# EAGLE board schematic (EAGLE 8.2.1)
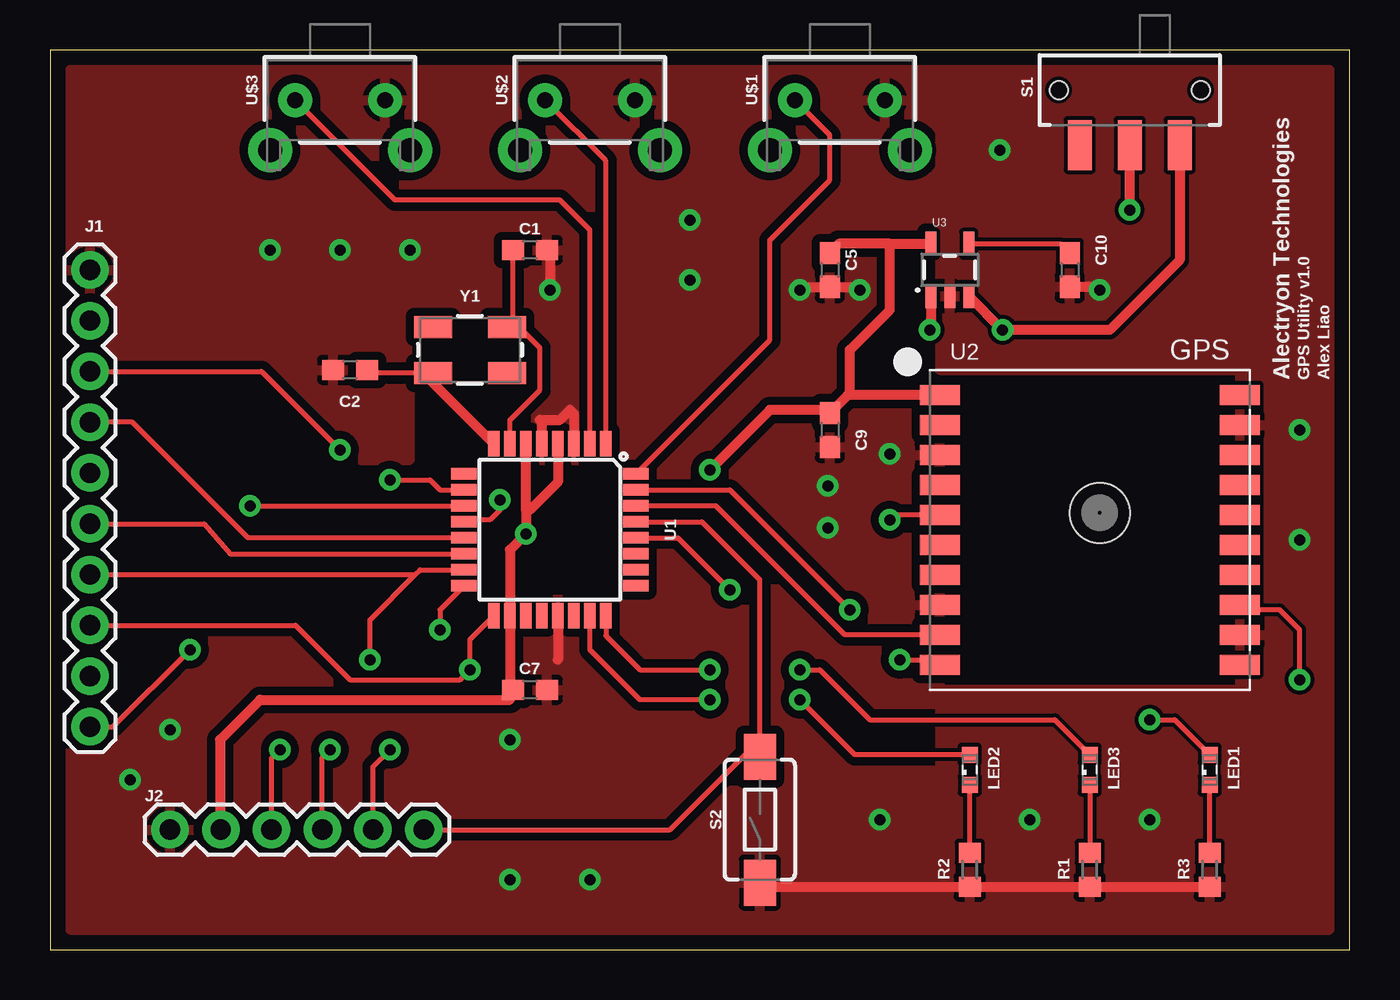
[diagram p0: board, top side]
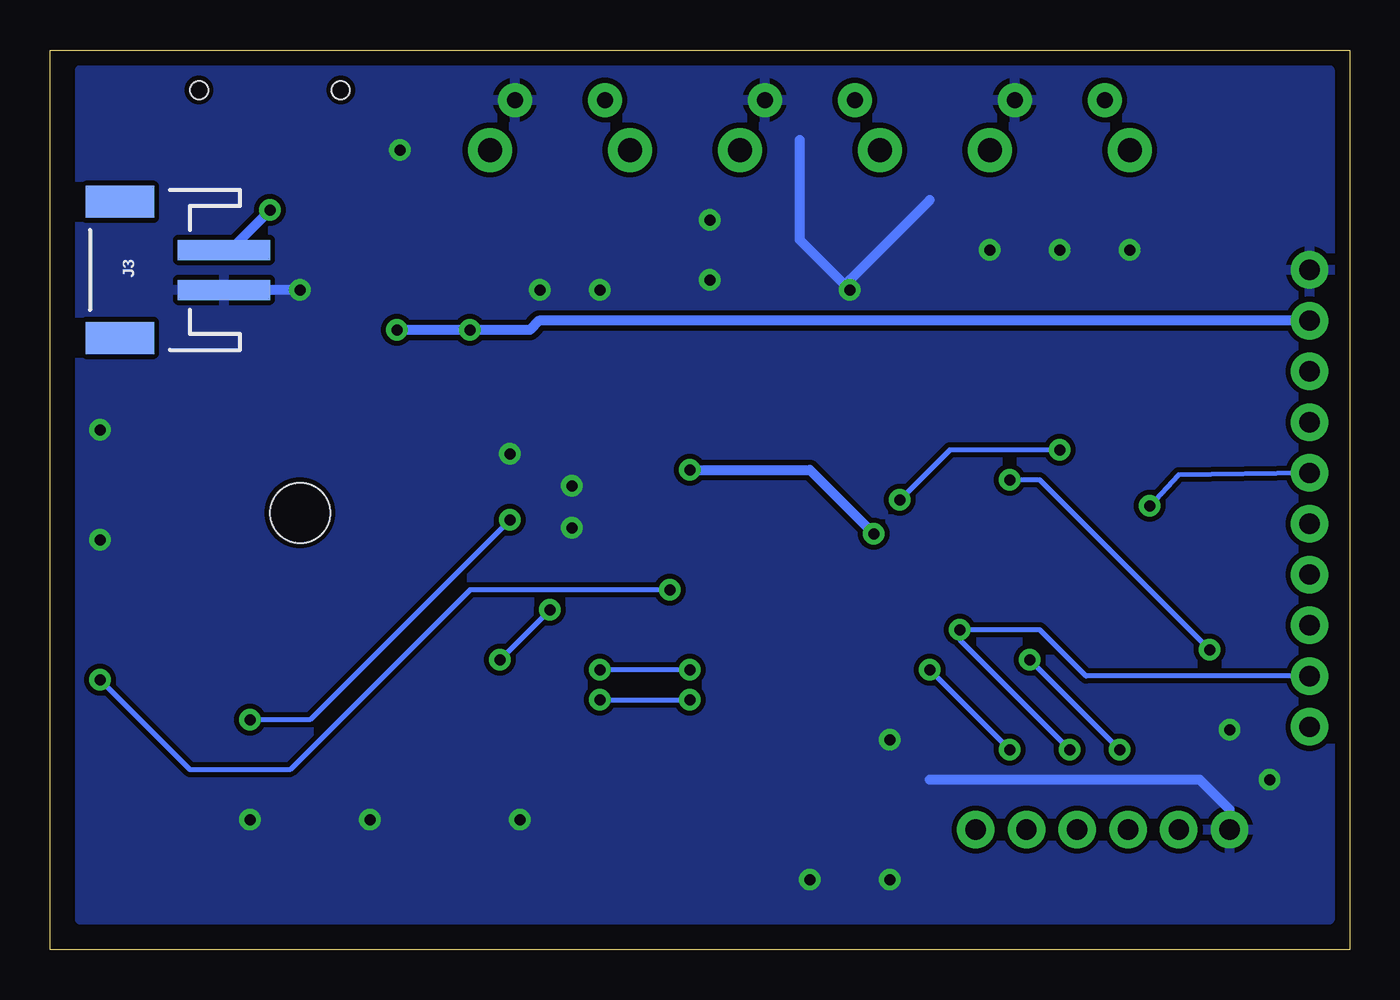
[diagram p1: board, bottom side, seen from below]

Size 65 x 45 mm. Coordinates in mm from the lower left corner, seen from the top.
Outline: 0,0 65,0 65,45 0,45 0,0
Copper layers (1*16): Top 0.035mm / dielectric 1.5mm / Bottom 0.035mm
Design rules "SparkFun": minimum track width 8mil, minimum drill 20mil, track to track 8mil, track to pad 8mil, pad to pad 8mil, via to via 8mil, smd to smd 8mil, copper to edge 8mil, drill to drill 8mil, minimum pad ring 12mil, minimum via ring 10mil, stop-mask expansion 4mil, vias tented up to drill 20mil, thermal gap 10mil

## Footprints (pad centres in the part's own frame; a part is rotated, then mirrored left to right if it is on the bottom)
0603 = smd 1.1 x 1: 1 -0.85,0; 2 0.85,0
1X10 = drill 1.016 pad 1.88: 1 0,0; 2 2.54,0; 3 5.08,0; 4 7.62,0; 5 10.16,0; 6 12.7,0; 7 15.24,0; 8 17.78,0; 9 20.32,0; 10 22.86,0
1X06 = drill 1.016 pad 1.88: 1 0,0; 2 2.54,0; 3 5.08,0; 4 7.62,0; 5 10.16,0; 6 12.7,0
JST-2-SMD = smd 1 x 4.6: 1 -1,-3.7; 2 1,-3.7 | smd 1.6 x 3.4: NC1 -3.4,1.5; NC2 3.4,1.5
LED_SML0603 = smd 0.8 x 0.8: A 0.75,0; C -0.75,0
R0603 = smd 1 x 1.1: 1 -0.85,0; 2 0.85,0
SWITCH_SPDT_SMD = smd 1.2 x 2.5: 1 -2.5,-2.75; 2 0,-2.75; 3 2.5,-2.75 | hole 0.9: -3.55,0; 3.55,0
TACTILE_SWITCH_SMD_6.0X3.5MM = smd 2.3 x 1.6: 1 -3.15,0; 2 3.15,0
TQFP32-08 = smd 1.27 x 0.559: 1 -4.293,2.8; 2 -4.293,2; 3 -4.293,1.2; 4 -4.293,0.4; 5 -4.293,-0.4; 6 -4.293,-1.2; 7 -4.293,-2; 8 -4.293,-2.8; 17 4.293,-2.8; 18 4.293,-2; 19 4.293,-1.2; 20 4.293,-0.4; 21 4.293,0.4; 22 4.293,1.2; 23 4.293,2; 24 4.293,2.8 | smd 0.559 x 1.27: 9 -2.8,-4.293; 10 -2,-4.293; 11 -1.2,-4.293; 12 -0.4,-4.293; 13 0.4,-4.293; 14 1.2,-4.293; 15 2,-4.293; 16 2.8,-4.293; 25 2.8,4.293; 26 2,4.293; 27 1.2,4.293; 28 0.4,4.293; 29 -0.4,4.293; 30 -1.2,4.293; 31 -2,4.293; 32 -2.8,4.293
FGPMMOPA6H = smd 2 x 1: P$1 -7.5,6.75; P$2 -7.5,5.25; P$3 -7.5,3.75; P$4 -7.5,2.25; P$5 -7.5,0.75; P$6 -7.5,-0.75; P$7 -7.5,-2.25; P$8 -7.5,-3.75; P$9 -7.5,-5.25; P$10 -7.5,-6.75; P$11 7.5,-6.75; P$12 7.5,-5.25; P$13 7.5,-3.75; P$14 7.5,-2.25; P$15 7.5,-0.75; P$16 7.5,0.75; P$17 7.5,2.25; P$18 7.5,3.75; P$19 7.5,5.25; P$20 7.5,6.75 | hole 3: 0.5,0.85
SOT23-5 = smd 0.55 x 1.2: 1 -0.95,-1.3; 2 0,-1.3; 3 0.95,-1.3; 4 0.95,1.3; 5 -0.95,1.3
TACTILE_SWITCH_PTH_RIGHT_ANGLE_KIT = drill 0.8 pad 1.7: 1 -2.25,0; 2 2.25,0 | drill 1.2 pad 2.2: ANCHOR1 -3.5,2.5; ANCHOR2 3.5,2.5
CRYSTAL-SMD-5X3.2-4PAD = smd 1.9 x 1.1: 1 -1.85,-1.15; 2 1.85,-1.15; 3 1.85,1.15; 4 -1.85,1.15

## Placement (x,y rotation side)
C1  22pF  [0603]  24,35 0 top
C2  22pF  [0603]  15,29 180 top
C5  10uF  [0603]  39,34 270 top
C7  0.1uF  [0603]  24,13 0 top
C9  0.1uF  [0603]  39,26 270 top
C10  470pF  [0603]  51,34 270 top
J1  LCD Connector  [1X10]  2,34 270 top
J2  Prog Connector  [1X06]  6,6 0 top
J3  Li-Po Connector  [JST-2-SMD]  60,34 90 bottom
LED1  Red  [LED_SML0603]  58,9 90 top
LED2  Green  [LED_SML0603]  46,9 90 top
LED3  Blue  [LED_SML0603]  52,9 90 top
R1  470  [R0603]  52,4 90 top
R2  470  [R0603]  46,4 90 top
R3  470  [R0603]  58,4 270 top
S1  PWR Switch  [SWITCH_SPDT_SMD]  54,43 0 top
S2  RST Switch  [TACTILE_SWITCH_SMD_6.0X3.5MM]  35.5,6.5 90 top
U1  ATMEGA328P_TQFP  [TQFP32-08]  25,21 270 top
U2  GPS Unit  [FGPMMOPA6H]  52,21 0 top
U3  3.3V/150mA  [SOT23-5]  45,34 0 top
U$1  TACTILE_SWITCH_RIGHT  [TACTILE_SWITCH_PTH_RIGHT_ANGLE_KIT]  39.5,42.5 180 top
U$2  TACTILE_SWITCH_RIGHT  [TACTILE_SWITCH_PTH_RIGHT_ANGLE_KIT]  27,42.5 180 top
U$3  [TACTILE_SWITCH_PTH_RIGHT_ANGLE_KIT]  14.5,42.5 180 top
Y1  16MHz  [CRYSTAL-SMD-5X3.2-4PAD]  21,30 0 top

## Library data of the parts
C1 C2 = SparkFun-Capacitors; PROD_ID: CAP-07876
C5 = SparkFun-Capacitors; PROD_ID: CAP-11015
C7 C9 = SparkFun-Capacitors; PROD_ID: CAP-00810
C10 = SparkFun-Capacitors; PROD_ID: CAP-07884
J1 = SparkFun-Connectors; PROD_ID: CONN-11563
J2 = SparkFun-Connectors; PROD_ID: CONN-08437
J3 = SparkFun-Connectors; PROD_ID: CONN-11443; SF_ID: PRT-08612
LED1-LED3 = eagle-ltspice; SPICEMODEL: NONE; SPICEPREFIX: D; SPICETYPE: diode
R1-R3 = resistor
S1 = SparkFun-Retired
S2 = SparkFun-Switches; PROD_ID: SWCH-00815; SF_SKU: COM-08229
U1 = SparkFun-IC-Microcontroller; PROD_ID: IC-09069
U2 = adafruit
U3 = SparkFun-IC-Power; PROD_ID: VREG-00822
U$1-U$3 = AlectryonLib
Y1 = SparkFun-Clocks; PROD_ID: XTAL-08218; SF_ID: COM-00094

## Nets
BACKLITE: J1.10 U1.10
CARD_CS: J1.5 U1.11
DOWNBTN: U1.2 U$3.2
GND: C1.2 C2.2 C5.2 C7.2 C9.2 C10.2 J1.1 J2.1 J3.1 R1.1 R2.1 R3.2 S2.1 U1.3 U1.5 U1.21 U2.P$3 U2.P$8 U2.P$12 U2.P$19 U3.2 U$1.1 U$2.1 U$3.1
LCD_CS: J1.6 U1.14
LCDD/C: J1.4 U1.13
LCDRST: J1.3 U1.12
LIPO: J3.2 S1.2
MISO: J1.9 J2.4 U1.16
MOSI: J1.7 J2.3 U1.15
N$1: C1.1 U1.7 Y1.3
N$2: C2.1 U1.8 Y1.1
N$3: LED1.C R3.1
N$6: C10.1 U3.4
N$8: LED3.C R1.2
N$9: LED2.C R2.2
N$12: LED1.A U2.P$5
PPS: U1.28 U2.P$13
RESET: J2.6 S2.2 U1.29
SCLK: J1.8 J2.5 U1.17
SLEEPBTN: U1.32 U$1.2
STATUS1: LED2.A U1.23
STATUS2: LED3.A U1.24
UARTRX: U1.30 U2.P$9
UARTTX: U1.31 U2.P$10
UPBTN: U1.1 U$2.2
VBATT: J1.2 S1.3 U3.1 U3.3
VCC: C5.1 C7.1 C9.1 J2.2 U1.4 U1.6 U1.18 U2.P$1 U3.5

## Tracks (layer width: path | path; a pad name or v marks a point on that pad's centre or on a via)
BACKLITE  (via drill 0.55)
  Top 0.254: J1.10 3.14,11.14 v7,15 | v17,23.5 19,23.5 19.5,23 U1.10
  Bottom 0.254: v17,23.5 15.5,23.5 v7,15
CARD_CS  (via drill 0.55)
  Top 0.254: v10,22.2 U1.11
  Bottom 0.254: J1.5 8.56,23.74 v10,22.2
DOWNBTN
  Top 0.254: U1.2 27,36 25.5,37.5 17.25,37.5 U$3.2
GND  (via drill 0.55)
  Top 0.508: 25,13 C7.2 | S2.1 35.7,3.15 R2.1 R1.1 R3.2 | v52.5,33 52.35,33.15 C10.2 | v40.5,33 40.35,33.15 C5.2 37.65,33.15 v37.5,33 | C1.2 25,34.85 v25,33 | U1.5 24.6,26.4 24.5,26.5 25.5,26.5 26,27 26.2,26.8 U1.3 | 25.4,16.51 U1.21 25.4,14.5
  Bottom 0.508: J2.1 6,7 7.5,8.5 21,8.5 | v52.5,33 J3.1 | 27.5,40.5 27.5,35.5 v25,33 25,33.5 21,37.5 | 29.25,42.25 U$2.1
  other vias: 23,10.5 11,35 14.5,35 18,35 32,36.5 32,33.5 38.9,23.2 62.5,26 62.5,20.5 55,6.5 41.5,6.5 49,6.5 27,3.5 23,3.5 6,11 4,8.5 42,24.8 38.9,21.1 47.5,40
  pour Bottom (isolate 0.254): 1,1.5 63.5,1.5 63.5,44 1,44
  pour Top (isolate 0.406): 44.5,44 1,44 1,29 11,29 15.5,24.5 18,24.5 18,32 23.5,32 23.5,24.5 30,24.5 30,17.5 8.5,17.5 1,10 1,1 44.5,1
  pour Top: 44.5,1 64,1 64,44 44.5,44 44.5,29 59.5,29 59.5,13 44.5,13
LCD_CS
  Top 0.254: J1.6 7.7,21.3 9,19.8 U1.14
LCDD/C
  Top 0.254: U1.13 9.9,20.6 4.12,26.38 J1.4
LCDRST  (via drill 0.55)
  Top 0.254: J1.3 10.58,28.92 v14.5,25 | v22.5,22.5 22.5,22 22,21.5 20.81,21.5 U1.12
  Bottom 0.254: v22.5,22.5 20,25 v14.5,25
LIPO  (via drill 0.55)
  Top 0.508: v54,37 S1.2
  Bottom 0.508: J3.2 56,35 v54,37
MISO  (via drill 0.55)
  Top 0.254: J2.4 13.62,9.62 v14,10 | 20.81,18.2 U1.16 19.5,16.99 v19.5,16
  Bottom 0.254: J1.9 13.18,13.68 15.5,16 v19.5,16 19.5,15.5 v14,10
MOSI  (via drill 0.55)
  Top 0.254: J2.3 11.08,9.58 v11.5,10 | U1.15 18.5,19 18.26,18.76 | v16,14.5 16,16.5 18.26,18.76 | J1.7 18.26,18.76
  Bottom 0.254: v11.5,10 v16,14.5
N$1
  Top 0.254: 23.15,31.45 C1.1 | 23.15,31.45 Y1.3 | U1.7 23,26.5 24.5,28 24.5,30.1 23.15,31.45
N$2
  Top 0.254: 19,29 Y1.1 19,28.85 16,28.85 C2.1 | 22.2,25.8 U1.8
  Top 0.508: U1.8 19,28.49 19,28.85
N$3
  Top 0.254: R3.1 LED1.C
N$6
  Top 0.254: U3.4 50.55,35.3 C10.1
N$8
  Top 0.254: LED3.C R1.2
N$9
  Top 0.254: R2.2 LED2.C
N$12  (via drill 0.55)
  Top 0.254: U2.P$5 42.25,21.75 v42,21.5 | v55,11.5 56.25,11.5 LED1.A
  Bottom 0.254: v42,21.5 43,20.5 52,11.5 v55,11.5
PPS  (via drill 0.55)
  Top 0.254: U1.28 31.4,20.6 v34,18 | v62.5,13.5 62.5,16 61.5,17 59.75,17 U2.P$13
  Bottom 0.254: v34,18 44,18 53,9 58,9 v62.5,13.5
RESET
  Top 0.254: U1.29 32.6,21.4 35.5,18.5 35.5,10.5 | 35.5,10.5 S2.2 | J2.6 31,6 35.5,10.5
SCLK  (via drill 0.55)
  Top 0.254: J2.5 16.16,9.16 v17,10 | U1.17 21,15.51 v21,14 20.5,13.5 15,13.5 12.28,16.22 J1.8
  Bottom 0.254: v17,10 v21,14
SLEEPBTN
  Top 0.254: U1.32 36,30.5 36,35.5 39,38.5 39,40.75 U$1.2
STATUS1  (via drill 0.55)
  Top 0.254: LED2.A 40.25,9.75 v37.5,12.5 | v33,12.5 29.5,12.5 27,15 U1.23
  Bottom 0.254: v37.5,12.5 v33,12.5
STATUS2  (via drill 0.55)
  Top 0.254: U1.24 27.8,15.7 29.5,14 v33,14 | v37.5,14 38.5,14 41,11.5 50.25,11.5 LED3.A
  Bottom 0.254: v33,14 v37.5,14
UARTRX
  Top 0.254: U2.P$9 39.75,15.75 33.3,22.2 U1.30
UARTTX  (via drill 0.55)
  Top 0.254: U1.31 34,23 39.5,17.5 v40,17 | v42.5,14.5 44.25,14.5 U2.P$10
  Bottom 0.254: v40,17 v42.5,14.5
UPBTN
  Top 0.254: U1.1 27.8,39.45 U$2.2
VBATT  (via drill 0.55)
  Top 0.508: S1.3 56.5,34.5 53,31 v47.65,31 U3.3 | U3.1 44.05,31.05 v44,31
  Bottom 0.508: J1.2 40.54,31.46 41,31 v44,31 v47.65,31
VCC  (via drill 0.55)
  Top 0.508: 42,35.3 U3.5 | 42,35.3 39.45,35.3 C5.1 | U2.P$1 40,27.75 | 40,27.75 39.9,27.75 C9.1 38.85,27 36,27 v33,24 | 40,27.75 40,30 42,32 42,35.3 | 23.8,22 v23.8,20.8 23,20 U1.18 23,13.15 C7.1 23,12.85 23,12.5 10.5,12.5 8.5,10.5 8.5,6.04 J2.2 | 23.8,22 U1.6 | U1.4 25.4,23.4 24,22 23.8,22
  Bottom 0.508: v33,24 27,24 v23.8,20.8

## Text on the board
tPlace: GPS | Alectryon Technologies | GPS Utility v1.0 | Alex Liao